# EAGLE board Tiny Tetris v1.0 (EAGLE 6.5.0)
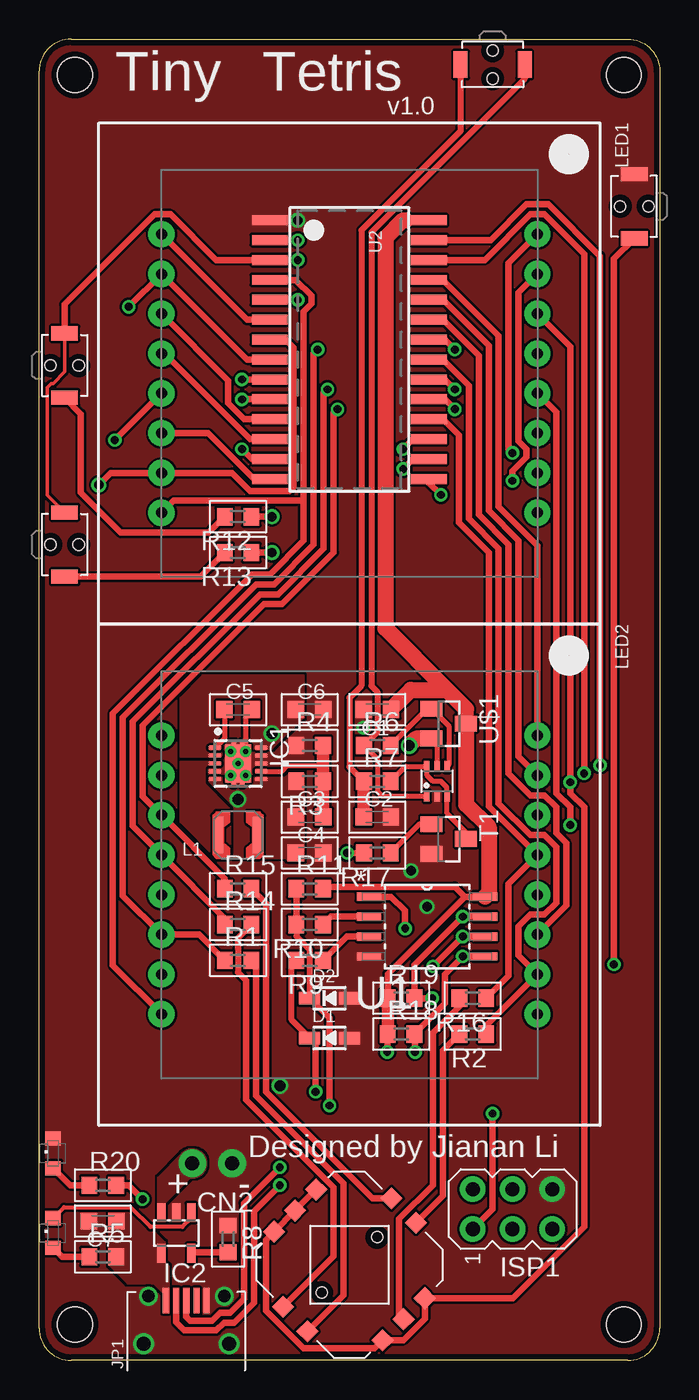
[diagram p0: board, top side]
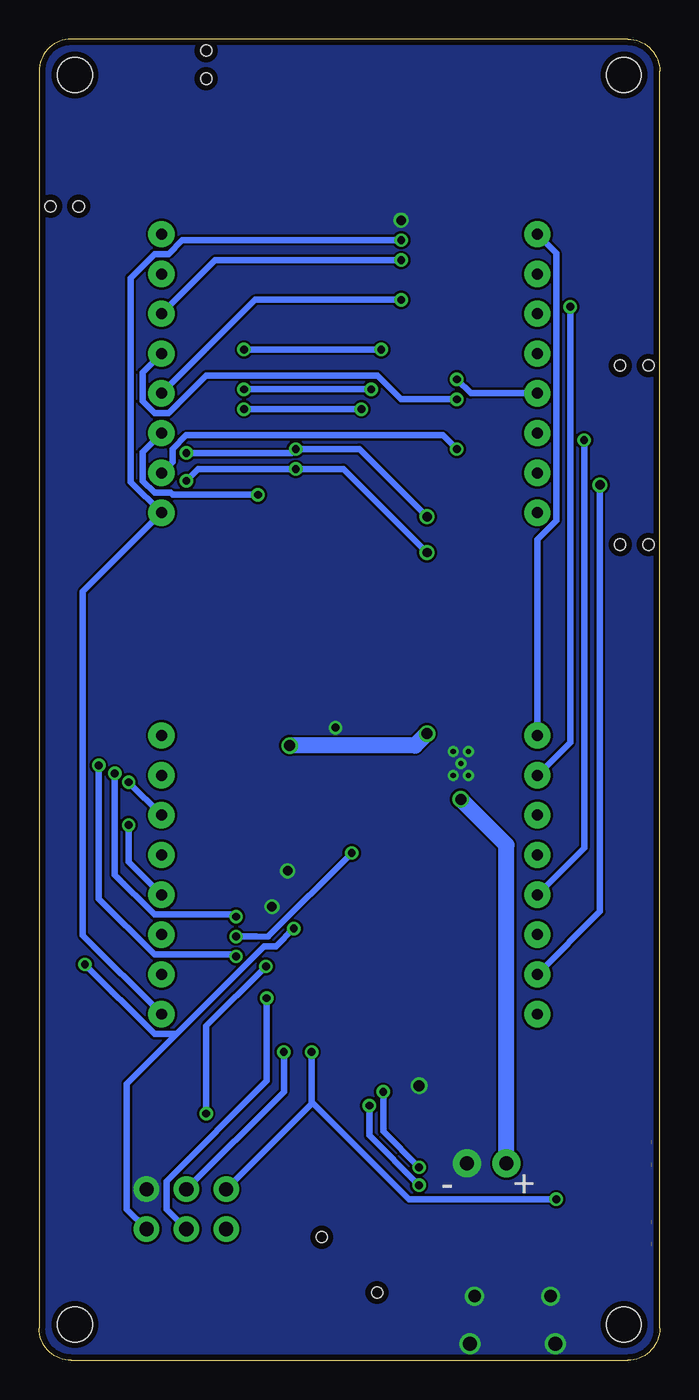
[diagram p1: board, bottom side, seen from below]

Size 39.62 x 84.33 mm. Coordinates in mm from the lower left corner, seen from the top.
Outline: 0,2.03 0,82.3 arc-90 2.03,84.33 37.59,84.33 arc-90 39.62,82.3 39.62,2.03 arc-90 37.59,0 2.03,0 arc-90 0,2.03
Copper layers (1*16): Top 0.0356mm / dielectric 1.5011mm / Bottom 0.0356mm
Design rules "LaenPCBOrder *": minimum track width 6mil, minimum drill 13mil, track to track 6mil, track to pad 6mil, pad to pad 6mil, via to via 6mil, smd to smd 6mil, copper to edge 15mil, drill to drill 6mil, minimum pad ring 7mil, minimum via ring 7mil, stop-mask expansion 0mil, vias tented up to drill 40mil, thermal gap 10mil
Holes 2.21 mm at 37.34,2.29 37.34,82.04 2.29,2.29 2.29,82.04

## Footprints (pad centres in the part's own frame; a part is rotated, then mirrored left to right if it is on the bottom)
TACT-ALPS-SKRELGE010 = smd 0.9 x 1.7: P$1 -2.05,0; P$2 2.05,0 | hole 0.7: 0,0.9; 0,-0.9
C0603K = smd 1.05 x 1.08: 1 -0.875,0; 2 0.875,0
1X02_NO_SILK = drill 0.9 pad 1.778: 1 0,0; 2 2.54,0
SOD-323 = smd 1.35 x 0.8: A 1.27,0; C -1.27,0
S-PDSO-N10 = smd 0.28 x 0.85: 1 -1,-1.475; 2 -0.5,-1.475; 3 0,-1.475; 4 0.5,-1.475; 5 1,-1.475; 6 1,1.475; 7 0.5,1.475; 8 0,1.475; 9 -0.5,1.475; 10 -1,1.475 | smd 2.4 x 1.65: PP 0,0 | smd 3 x 0.28: PP@1 0,0.275; PP@2 0,-0.275 | drill 0.33 pad 0.508: PP@3 -0.762,0.483; PP@4 0.762,0.483; PP@5 0,0; PP@6 -0.762,-0.483; PP@7 0.762,-0.483
SOT23-5L = smd 0.55 x 1.2: 1 -0.95,-1.3; 2 0,-1.3; 3 0.95,-1.3; 4 0.95,1.3; 5 -0.95,1.3
AVRISP = drill 0.9 pad 1.626: 1 -1.27,2.54; 2 1.27,2.54; 3 -1.27,0; 4 1.27,0; 5 -1.27,-2.54; 6 1.27,-2.54
JOYSTICK-NOKIA-3230 = smd 1 x 1 rotated 315: 1 -2.121,4.808; 2 -4.808,2.121; 3 2.121,-4.808; 4 4.808,-2.121; 5 -3.465,3.465; A 2.687,4.243; B -4.243,-2.687; C -2.687,-4.243; D 4.243,2.687; E 3.465,-3.465 | hole 0.7: 1.768,1.768; -1.768,-1.768
FCI-10103594-0001LF = smd 0.4 x 1.6: 1 -1.3,4.45; 2 -0.65,4.45; 3 0,4.45; 4 0.65,4.45; 5 1.3,4.45 | drill 0.8: P$1 -2.425,4.73; P$2 2.425,4.73 | drill 0.9: P$3 -2.725,1.7; P$4 2.725,1.7
LPS3015 = smd 0.635 x 2.286: P$1 -1.27,0; P$2 1.27,0
SEGMENT_BL-M12A883 = drill 0.7 pad 1.676: 1 -8.89,-12; 2 -6.35,-12; 3 -3.81,-12; 4 -1.27,-12; 5 1.27,-12; 6 3.81,-12; 7 6.35,-12; 8 8.89,-12; 9 8.89,12; 10 6.35,12; 11 3.81,12; 12 1.27,12; 13 -1.27,12; 14 -3.81,12; 15 -6.35,12; 16 -8.89,12
LED-0603-SIDEVIEW = smd 0.9 x 1: P$1 -0.95,0; P$2 0.95,0
R0603 = smd 1 x 1.1: 1 -0.85,0; 2 0.85,0
SOT23-BEC = smd 1 x 1.4: B -0.95,-1.1; C 0,1.1; E 0.95,-1.1
SOIC127P798X216-8N = smd 1.549 x 0.533: 1 -3.708,1.905; 2 -3.708,0.635; 3 -3.708,-0.635; 4 -3.708,-1.905; 5 3.708,-1.905; 6 3.708,-0.635; 7 3.708,0.635; 8 3.708,1.905
SOP28_300MIL = smd 0.635 x 2.286: P$1 -8.255,-5.08; P$2 -6.985,-5.08; P$3 -5.715,-5.08; P$4 -4.445,-5.08; P$5 -3.175,-5.08; P$6 -1.905,-5.08; P$7 -0.635,-5.08; P$8 0.635,-5.08; P$9 1.905,-5.08; P$10 3.175,-5.08; P$11 4.445,-5.08; P$12 5.715,-5.08; P$13 6.985,-5.08; P$14 8.255,-5.08; P$15 8.255,5.08; P$16 6.985,5.08; P$17 5.715,5.08; P$18 4.445,5.08; P$19 3.175,5.08; P$20 1.905,5.08; P$21 0.635,5.08; P$22 -0.635,5.08; P$23 -1.905,5.08; P$24 -3.175,5.08; P$25 -4.445,5.08; P$26 -5.715,5.08; P$27 -6.985,5.08; P$28 -8.255,5.08
SOT23 = smd 1 x 1.4: 1 -0.95,-1.1; 2 0.95,-1.1; 3 0,1.1
SC-70-6 = smd 0.35 x 0.7: 1 -0.65,-0.95; 2 0,-0.95; 3 0.65,-0.95; 4 0.65,0.95; 5 0,0.95; 6 -0.65,0.95

## Placement (x,y rotation side)
BRIGHTNESS-DOWN  [TACT-ALPS-SKRELGE010]  1.63,52.07 270 top
BRIGHTNESS-UP  [TACT-ALPS-SKRELGE010]  1.63,63.5 270 top
C1  10uF  [C0603K]  21.59,41.53 180 top
C2  0.1uF  [C0603K]  21.59,34.67 0 top
C3  0.1uF  [C0603K]  17.27,34.67 0 top
C4  10uF  [C0603K]  17.27,32.39 0 top
C5  0.1uF  [C0603K]  12.7,41.53 0 top
C6  22uF  [C0603K]  17.27,41.53 0 top
C7  4.7uF  [C0603K]  4.06,8.89 180 top
CN2  M02-JST-2MM-SMT  [1X02_NO_SILK]  12.32,12.57 180 top
D1  3.6V  [SOD-323]  18.54,20.57 0 top
D2  3.6V  [SOD-323]  18.54,23.11 0 top
IC1  TPS61202  [S-PDSO-N10]  12.7,38.1 270 top
IC2  MCP73831/OT  [SOT23-5L]  8.76,8.13 180 top
ISP1  AVRISP-6  [AVRISP]  30.23,9.65 90 top
JOYSTICK-  [JOYSTICK-NOKIA-3230]  19.81,6.1 0 top
JP1  USB-RECEPTABLE  [FCI-10103594-0001LF]  9.4,-0.63 0 top
L1  2.2uH  [LPS3015]  12.7,33.53 180 top
LED1  [SEGMENT_BL-M12A883]  19.81,62.99 270 top
LED2  [SEGMENT_BL-M12A883]  19.81,30.99 270 top
LED3  Red  [LED-0603-SIDEVIEW]  0.89,8.13 90 top
LED4  Green  [LED-0603-SIDEVIEW]  0.89,13.21 90 top
POWER  [TACT-ALPS-SKRELGE010]  28.96,82.7 180 top
R1  10k  [R0603]  12.7,25.53 0 top
R2  10k  [R0603]  27.69,20.83 180 top
R3  3M  [R0603]  17.27,36.96 180 top
R4  240k  [R0603]  17.27,39.24 0 top
R5  1k  [R0603]  4.06,6.6 0 top
R6  100k  [R0603]  21.59,39.24 0 top
R7  100k  [R0603]  21.59,36.96 0 top
R8  2k  [R0603]  12.07,7.75 270 top
R9  68  [R0603]  17.27,25.53 180 top
R10  68  [R0603]  17.27,27.81 180 top
R11  1.5k  [R0603]  17.27,30.1 0 top
R12  10k  [R0603]  12.7,53.85 180 top
R13  10k  [R0603]  12.7,51.56 180 top
R14  10k  [R0603]  12.7,27.81 0 top
R15  10k  [R0603]  12.7,30.1 0 top
R16  10k  [R0603]  27.69,23.11 180 top
R17  1k  [R0603]  21.59,32.39 180 top
R18  10k  [R0603]  23.11,20.83 0 top
R19  10k  [R0603]  23.11,23.11 0 top
R20  1k  [R0603]  4.06,11.18 0 top
RESET  [TACT-ALPS-SKRELGE010]  38,73.66 90 top
T1  MMBT2222  [SOT23-BEC]  26.16,33.27 270 top
U1  ATTINY85-20SU  [SOIC127P798X216-8N]  24.77,27.69 0 top
U2  28-SOIC  [SOP28_300MIL]  19.81,64.52 270 top
U$1  IRLML6402  [SOT23]  26.16,40.64 270 top
U$2  NC7WZ14  [SC-70-6]  25.4,36.96 0 top

## Library data of the parts
BRIGHTNESS-DOWN BRIGHTNESS-UP JOYSTICK- LED3 LED4 POWER RESET U$1 U$2 = Jianan Li
C1-C7 R1-R20 = resistor
CN2 = SparkFun-Connectors
D1 D2 LED1 LED2 U2 = microbuilder
IC1 = texas; MPN: TPS61202DRCR; OC_FARNELL: unknown; OC_NEWARK: 37M0069
IC2 ISP1 = adafruit
JP1 = Micro USB
L1 = Coilcraft
T1 = transistor
U1 = Atmel_By_element14_Batch_1; MPN: ATTINY85-20SU; OC_FARNELL: 1455164; OC_NEWARK: 58M3797; PACKAGE: SOIC-8; SUPPLIER: Atmel

## Nets
+5V: C6.1 IC1.2 IC1.10 U$1.2 U$2.5
A0: LED2.11 U2.P$23
A1: LED2.15 U2.P$24
A2: LED2.16 U2.P$25
D+: D1.C JP1.3 R9.2
D-: D2.C JP1.2 R10.2 R11.1
GND: C1.2 C2.2 C4.2 C5.2 C6.2 C7.2 CN2.1 D1.A D2.A IC1.4 IC1.8 IC1.9 IC1.PP IC1.PP@1 IC1.PP@2 IC1.PP@3 IC1.PP@4 IC1.PP@5 IC1.PP@6 IC1.PP@7 IC2.2 ISP1.6 JP1.5 JP1.P$1 JP1.P$2 JP1.P$3 JP1.P$4 LED4.P$2 R4.1 R8.1 RESET.P$2 T1.E U1.4 U2.P$1 U$2.2
K1: LED2.6 R1.1 U2.P$22
K2: LED2.10 R2.1 U2.P$21
K3: LED2.4 R14.1 U2.P$20
K4: LED2.3 R15.1 U2.P$19
K5: LED2.13 R16.1 U2.P$18
K6: LED1.16 R12.1 U2.P$17
K7: LED1.15 R13.1 U2.P$16
K8: LED1.11 U2.P$15
KILL: ISP1.1 R17.2 U1.6
KS0: BRIGHTNESS-DOWN.P$1 BRIGHTNESS-UP.P$1 JOYSTICK-.1 JOYSTICK-.2 JOYSTICK-.3 JOYSTICK-.4 JOYSTICK-.5 LED1.14 LED2.14 U2.P$3
N$1: LED1.5 LED2.5 U2.P$9
N$2: LED3.P$1 R5.1
N$3: JOYSTICK-.C R1.2
N$4: R6.2 U$1.1 U$2.4
N$5: R17.1 T1.B
N$6: POWER.P$1 R6.1 U$2.1
N$7: JOYSTICK-.D R2.2
N$8: LED1.9 LED2.9 U2.P$2
N$9: IC1.3 L1.P$2
N$10: C2.1 POWER.P$2 R7.1
N$11: JOYSTICK-.B R14.2
N$12: R7.2 T1.C U$2.3 U$2.6
N$13: JOYSTICK-.A R15.2
N$14: C5.1 IC1.1
N$15: JOYSTICK-.E R16.2
N$16: C3.2 IC1.7 R3.1 R4.2
N$17: IC2.1 LED3.P$2
N$18: IC2.5 R8.2
N$19: R9.1 U1.3
N$20: R10.1 U1.2
N$21: BRIGHTNESS-UP.P$2 R12.2
N$22: LED1.3 U2.P$11
N$23: LED1.4 U2.P$12
N$24: LED1.10 U2.P$13
N$25: LED1.6 U2.P$14
N$26: BRIGHTNESS-DOWN.P$2 R13.2
N$27: LED4.P$1 R20.1
N$30: LED1.8 LED2.8 U2.P$4
N$32: LED1.12 LED2.12 U2.P$5
N$33: LED1.1 LED2.1 U2.P$6
N$34: LED1.7 LED2.7 U2.P$7
N$35: LED1.2 LED2.2 U2.P$8
ROW15: LED1.13 U2.P$10
RST: ISP1.5 RESET.P$1 U1.1
SCL: ISP1.3 R19.2 U1.7 U2.P$26
SDA: ISP1.4 R18.2 U1.5 U2.P$27
VBATT: C3.1 C4.1 CN2.2 IC1.5 IC1.6 IC2.3 L1.P$1 R3.2
VDD: C1.1 ISP1.2 R11.2 R18.1 R19.1 R20.2 U1.8 U2.P$28 U$1.3
VUSB: C7.1 IC2.4 JP1.1 R5.2

## Tracks (layer width: path | path; a pad name or v marks a point on that pad's centre or on a via)
+5V  (via drill 0.7)
  Top 0.305: U$1.2 25.4,39.35 U$2.5
  Top 1.016: U$1.2 24.07,39.69 v23.62,39.24
  Bottom 1.016: v14.86,40.01 15.62,39.24 v23.62,39.24
  pour Top (no thermals): 11.58,38.53 9.02,38.53 9.02,42.29 10.44,43.71 16.87,43.71 16.87,41.05 14.86,39.04 12.09,39.04
A0
  Top 0.406: LED2.11 33.66,29.02 33.66,33.02 33.02,33.66 33.02,35.31 32.26,36.07 31.37,36.07 29.97,37.47 29.97,52.07 28.07,53.98 28.07,64.14 25.78,66.42 U2.P$23
A1
  Top 0.406: LED2.15 30.61,38.54 30.61,52.32 28.7,54.23 28.7,64.77 25.78,67.69 U2.P$24
A2
  Top 0.406: LED2.16 31.81,52.01 29.34,54.48 29.34,65.41 25.78,68.96 U2.P$25
D+  (via drill 0.5)
  Top 0.381: D1.C 16.13,21.72 16.13,25.23 R9.2
  Top 0.406: D1.C 17.65,20.19 v17.65,17.15 | v15.37,12.32 13.08,10.03 13.08,3.94 12.19,3.05 11.56,3.05 11.05,2.54 9.65,2.54 9.4,2.79 JP1.3
  Bottom 0.406: v15.37,12.32 17.65,14.61 v17.65,17.15
D-  (via drill 0.5)
  Top 0.381: D2.C 17.27,26.23 16.42,27.08 R10.2
  Top 0.406: R11.1 R10.2 | D2.C 18.54,21.84 v18.54,16.26 | JP1.2 8.75,2.43 9.27,1.91 11.3,1.91 11.81,2.41 12.45,2.41 13.72,3.68 13.72,9.52 v15.37,11.18
  Bottom 0.406: v15.37,11.18 18.54,14.35 v18.54,16.26
GND  (via drill 0.5, 0.6, 0.7)
  Top 0.305: C5.2 13.18,41.14 IC1.PP@3
  other vias: 20.7,40.39 16.51,72.77 24.77,28.96 23.75,31.24 15.37,17.53
  pour Bottom (no thermals): 2.03,84.33 arc90 0,82.3 0,2.03 arc90 2.03,0 37.59,0 arc90 39.62,2.03 39.62,82.3 arc90 37.59,84.33
  pour Top (rank 6, no thermals): 2.03,84.33 arc90 0,82.3 0,2.03 arc90 2.03,0 37.59,0 arc90 39.62,2.03 39.62,82.3 arc90 37.59,84.33
K1  (via drill 0.5)
  Top 0.406: v26.54,64.52 25.91,65.15 U2.P$22 | v17.78,64.52 17.53,64.26 17.53,52.07 14.99,49.53 13.84,49.53 5.33,41.02 5.33,29.66 LED2.6 10.2,27.18 R1.1
  Bottom 0.406: v17.78,64.52 v26.54,64.52
K2
  Top 0.406: U2.P$21 25.78,63.88 27.43,62.23 27.43,53.72 29.34,51.82 29.34,35.56 31.37,33.53 32.26,33.53 33.02,32.77 33.02,29.21 32.26,28.45 31.37,28.45 30.61,27.69 30.61,25.84 LED2.10 28.54,21.36 R2.1
K3  (via drill 0.5)
  Top 0.406: U2.P$20 25.91,62.61 v26.54,61.98 | v18.42,61.98 18.16,61.72 18.16,51.82 15.24,48.9 14.1,48.9 5.97,40.77 5.97,34.1 LED2.4 11.85,28.22 R14.1
  Bottom 0.406: v26.54,61.98 v18.42,61.98
K4  (via drill 0.5)
  Top 0.406: U2.P$19 25.91,61.34 v26.54,60.71 | v19.05,60.71 18.8,60.45 18.8,51.56 15.49,48.26 14.35,48.26 6.6,40.51 6.6,36.01 LED2.3 11.85,30.76 R15.1
  Bottom 0.406: v26.54,60.71 v19.05,60.71
K5
  Top 0.406: U2.P$18 25.78,60.07 26.8,59.05 26.8,53.47 28.7,51.56 28.7,35.37 LED2.13 29.97,30.42 29.97,24.55 R16.1
K6  (via drill 0.5, 0.6)
  Top 0.406: U2.P$17 23.88,58.8 v23.24,58.17 | LED1.16 29.97,70.04 29.97,58.17 v30.23,57.91 | v14.86,53.85 R12.1
  Bottom 0.406: v30.23,57.91 23.5,57.91 v23.24,58.17 19.18,58.17 v14.86,53.85
K7  (via drill 0.5, 0.6)
  Top 0.406: U2.P$16 23.88,57.53 v23.24,56.9 | LED1.15 30.61,68.14 30.61,58.67 31.12,58.17 31.12,57.66 30.23,56.77 v30.23,56.13 | v14.86,51.56 R13.1
  Bottom 0.406: v30.23,56.13 29.46,56.9 v23.24,56.9 20.19,56.9 v14.86,51.56
K8  (via drill 0.5)
  Top 0.406: v25.65,55.25 24.89,56.01 U2.P$15
  Bottom 0.406: LED1.11 33.02,57.97 33.02,56.13 32.26,55.37 31.24,55.37 31.12,55.25 v25.65,55.25
KILL  (via drill 0.5)
  Top 0.381: v19.66,32.39 R17.2
  Top 0.406: U1.6 v27.05,27.05 v25.15,25.15 | 20.74,32.09 R17.2 | v28.96,15.75 28.96,9.65 ISP1.1
  Bottom 0.381: 25.78,27.05 24.99,27.05 v19.66,32.39
  Bottom 0.406: v27.05,27.05 25.78,27.05 | v25.15,25.15 28.96,21.34 v28.96,15.75
KS0  (via drill 0.5)
  Top 0.229: BRIGHTNESS-UP.P$1 1.63,63.09 0.89,62.36 0.76,62.36 0.51,62.1 0.51,55.24 BRIGHTNESS-DOWN.P$1
  Top 0.406: v16.51,70.23 U2.P$3 11.3,70.23 8.38,73.15 7.37,73.15 1.63,67.41 BRIGHTNESS-UP.P$1 | LED1.14 33.91,64.7 v33.91,36.9 33.91,36.2 34.8,35.31 34.8,8.51 30.26,3.98 JOYSTICK-.4 24.62,2.65 23.26,1.29 JOYSTICK-.3 | JOYSTICK-.1 JOYSTICK-.5 JOYSTICK-.2 14.48,7.69 14.48,3.18 16.89,0.76 21.41,0.76 JOYSTICK-.3 | 21.93,1.31 JOYSTICK-.3
  Bottom 0.406: LED2.14 v33.91,36.9 | v16.51,70.23 28.38,70.23 LED1.14
N$1  (via drill 0.5)
  Top 0.406: LED1.5 v4.83,58.74 | v12.95,62.61 U2.P$9
  Bottom 0.406: LED2.5 4.83,32.7 v4.83,58.74 | LED1.5 12.07,61.72 v12.95,62.61
N$2
  Top 0.406: LED3.P$1 1.46,6.6 R5.1
N$3
  Top 0.406: JOYSTICK-.C 19.43,4.16 19.43,11.3 13.84,16.89 13.84,25.23 R1.2
N$4
  Top 0.305: R6.2 24.79,41.59 U$1.1 26.16,40.49 26.16,38.02 U$2.4
N$5
  Top 0.305: T1.B 24.28,34.22 R17.1
N$6
  Top 0.305: R6.1 21.59,38.39 21.59,36.32 21.91,36.01 U$2.1
  Top 0.381: R6.1 21.59,40.09 21.59,42.67 21.21,43.05 21.21,72.01 31.01,81.81 POWER.P$1
N$7
  Top 0.406: R2.2 25.78,19.77 25.78,10.51 JOYSTICK-.D
N$8  (via drill 0.5)
  Top 0.406: v16.51,71.5 U2.P$2
  Bottom 0.406: LED2.9 36.83,27.12 36.83,49.08 LED1.9 33.78,56.07 33.78,69.09 32.26,70.61 31.37,70.61 30.48,71.5 v16.51,71.5
N$9
  pour Top (no thermals): 10.87,38.18 9.02,38.18 9.02,34.37 11.3,32.08 12.14,32.08 12.14,35.23 10.57,36.8 10.57,37.85 10.74,38.02 10.87,38.02
N$10
  Top 0.305: 20.74,34.7 C2.1
  Top 0.381: R7.1 19.81,37.89 19.81,42.29 20.57,43.05 20.57,72.14 26.91,78.47 POWER.P$2
  Top 0.813: R7.1 20.71,36.93 C2.1
N$11
  Top 0.381: 12.7,26.29 12.7,24.77
  Top 0.406: JOYSTICK-.B 18.8,6.64 18.8,11.05 13.21,16.64 13.21,24.26 12.7,24.77 | R14.2 12.7,26.96 12.7,26.29
N$12
  Top 0.305: R7.2 23.39,37.91 U$2.6 24.77,37.89 24.77,37.34 25.15,36.96 25.65,36.96 26.04,36.58 26.04,36.02 U$2.3 26.05,34.91 27.26,33.7 T1.C
N$13
  Top 0.406: JOYSTICK-.A 21.59,10.34 21.41,10.34 21.28,10.34 14.48,17.15 14.48,29.17 R15.2
N$14
  Top 0.305: C5.1 11.83,39.7 IC1.1
N$15
  Top 0.406: R16.2 26.84,22.61 25.15,20.92 25.15,11.18 22.99,9.02 22.99,2.92 JOYSTICK-.E
N$16
  Top 0.305: IC1.7 14.18,37.59 15.49,37.59 15.88,37.97 18.12,37.97
  Top 0.813: R4.2 18.12,37.97 R3.1 18.12,34.7 C3.2
N$17
  Top 0.254: IC2.1 9.71,9.08 9.14,8.51 7.11,8.51 5.84,9.78 1.59,9.78 LED3.P$2
N$18
  Top 0.406: R8.2 9.78,6.9 IC2.5
N$19
  Top 0.406: U1.3 19.65,27.05 R9.1
N$20
  Top 0.406: U1.2 18.63,28.32 R10.1
N$21
  Top 0.406: BRIGHTNESS-UP.P$2 2.67,60.41 2.67,55.37 5.21,52.83 10.83,52.83 R12.2
N$22
  Top 0.406: LED1.3 12.07,62.55 12.07,61.09 13.08,60.07 U2.P$11
N$23
  Top 0.406: LED1.4 8,64.26 13.46,58.8 U2.P$12
N$24  (via drill 0.5)
  Top 0.406: v12.95,58.17 13.59,57.53 U2.P$13
  Bottom 0.406: LED1.10 31.12,57.34 31.12,58.17 30.23,59.05 13.84,59.05 v12.95,58.17
N$25
  Top 0.406: LED1.6 10.8,59.18 13.72,56.26 U2.P$14
N$26
  Top 0.406: BRIGHTNESS-DOWN.P$2 10.31,50.02 R13.2
N$27
  Top 0.406: LED4.P$1 1.97,11.18 R20.1
N$30
  Top 0.406: U2.P$4 16.38,68.96 17.4,67.94 17.4,67.44 16.89,66.93 16.89,54.86 | LED2.8 4.7,25.21 4.7,41.28 13.59,50.16 14.73,50.16 16.89,52.32 16.89,54.86 | LED1.8 8.57,54.86 16.89,54.86
N$32  (via drill 0.5)
  Top 0.406: v16.51,67.69 U2.P$5 | v33.91,34.16 33.91,35.31 33.02,36.2 33.02,60.51 LED1.12
  Bottom 0.406: LED2.12 33.91,31.82 v33.91,34.16 | v16.51,67.69 25.84,67.69 LED1.12
N$33
  Top 0.406: U2.P$6 13.27,66.42 LED1.1
  Bottom 0.406: LED2.1 7.81,52.39 6.6,53.59 6.6,70.67 LED1.1
N$34  (via drill 0.6)
  Top 0.406: U2.P$7 15.75,65.15 16.26,64.64 16.26,55.75 16,55.5 13.46,55.5 12.32,56.64 LED1.7 4.57,56.64 v3.81,55.88
  Bottom 0.406: LED2.7 3.81,28.64 v3.81,55.88
N$35  (via drill 0.5)
  Top 0.406: U2.P$8 13.27,63.88 LED1.2 v5.72,67.25
  Bottom 0.406: LED2.2 5.72,39.44 v5.72,67.25
ROW15  (via drill 0.5)
  Top 0.406: v12.95,61.34 U2.P$10
  Bottom 0.406: LED1.13 33.02,63.05 33.02,61.21 32.26,60.45 31.37,60.45 28.96,62.87 18.03,62.87 16.51,61.34 v12.95,61.34
RST  (via drill 0.5)
  Top 0.406: U1.1 22.48,29.59 23.37,28.7 v23.37,27.56 | RESET.P$1 36.7,70.31 v36.7,25.27
  Bottom 0.406: v23.37,27.56 24.51,26.42 25.27,26.42 30.86,20.83 | 30.86,20.83 34.04,17.65 34.04,9.65 ISP1.5 | v36.7,25.27 32.26,20.83 30.86,20.83
SCL  (via drill 0.5)
  Top 0.406: U1.7 v27.05,28.32 23.96,25.23 R19.2 v25.1,23.11 | v34.8,37.47 34.8,70.61 32.26,73.15 31.37,73.15 28.45,70.23 U2.P$26
  Bottom 0.406: v34.8,37.47 34.8,30.99 32.26,28.45 27.18,28.45 v27.05,28.32 | ISP1.3 31.5,9.65 31.5,11.43 25.1,17.83 v25.1,23.11
SDA  (via drill 0.5)
  Top 0.406: U1.5 v27.05,25.78 25.91,24.64 25.91,22.77 R18.2 24,20.79 v24,19.69 | v35.81,37.97 35.81,70.48 32.51,73.79 31.12,73.79 28.83,71.5 U2.P$27
  Bottom 0.406: v35.81,37.97 35.81,29.46 32.26,25.91 27.18,25.91 v27.05,25.78 | v24,19.69 24,17.15 ISP1.4
VBATT  (via drill 0.7)
  Bottom 1.016: CN2.2 9.78,32.89 v12.7,35.81
  pour Top (rank 2, no thermals): 10.87,37.16 10.87,36.93 12.47,35.33 12.47,32.08 15.72,32.08 15.9,31.9 16.87,31.9 16.87,37.44 15.95,37.44 15.67,37.16
  pour Top (no thermals): 7.59,8.86 7.59,11.66 9.14,13.21 arc-231 9.68,11.68 8.03,10.03 8.03,8.86
VDD  (via drill 0.5)
  Top 0.406: R11.2 18.25,30.23 26.54,30.23 27.18,29.59 | R19.1 22.26,24.68 27.18,29.59 | R18.1 22.23,20.79 v22.23,19.69 | 23.37,72.77 U2.P$28 | R20.2 5.72,11.18 v6.6,10.29 | 27.18,29.59 U1.8
  Top 0.813: R19.1 R18.1
  Top 1.016: U1.8 28.7,29.82 28.7,34.04 27.26,35.48 U$1.3 27.26,41.57 26.04,42.8 | 23.37,72.77 23.24,72.77 22.1,71.63 22.1,46.74 26.04,42.8 | C1.1 23.73,42.8 26.04,42.8
  Bottom 0.406: v22.23,19.69 22.23,16.51 | 22.23,16.51 22.23,16.38 ISP1.2 | 22.23,16.51 16,10.29 v6.6,10.29
VUSB
  pour Top (no thermals): 8.26,3.07 8.26,5.99 8.03,6.22 8.03,7.54 6.07,9.5 4.47,9.5 4.47,6.1 5.64,4.93 7.32,4.93 7.95,4.29 7.95,3.07

## Text on the board
tPlace: Tiny | Tetris | v1.0 | Designed by Jianan Li | + | -
bPlace: + | -